# Altium PCB PCB.PcbDoc
Units mil, origin at the board's own origin, x right, y up, seen from the top; angles counter-clockwise.
Board outline 2499.71 x 2229.35 mil, 2 copper layers (Top Layer, Bottom Layer); 11 components, 29 nets, 80 pads, 62 vias.
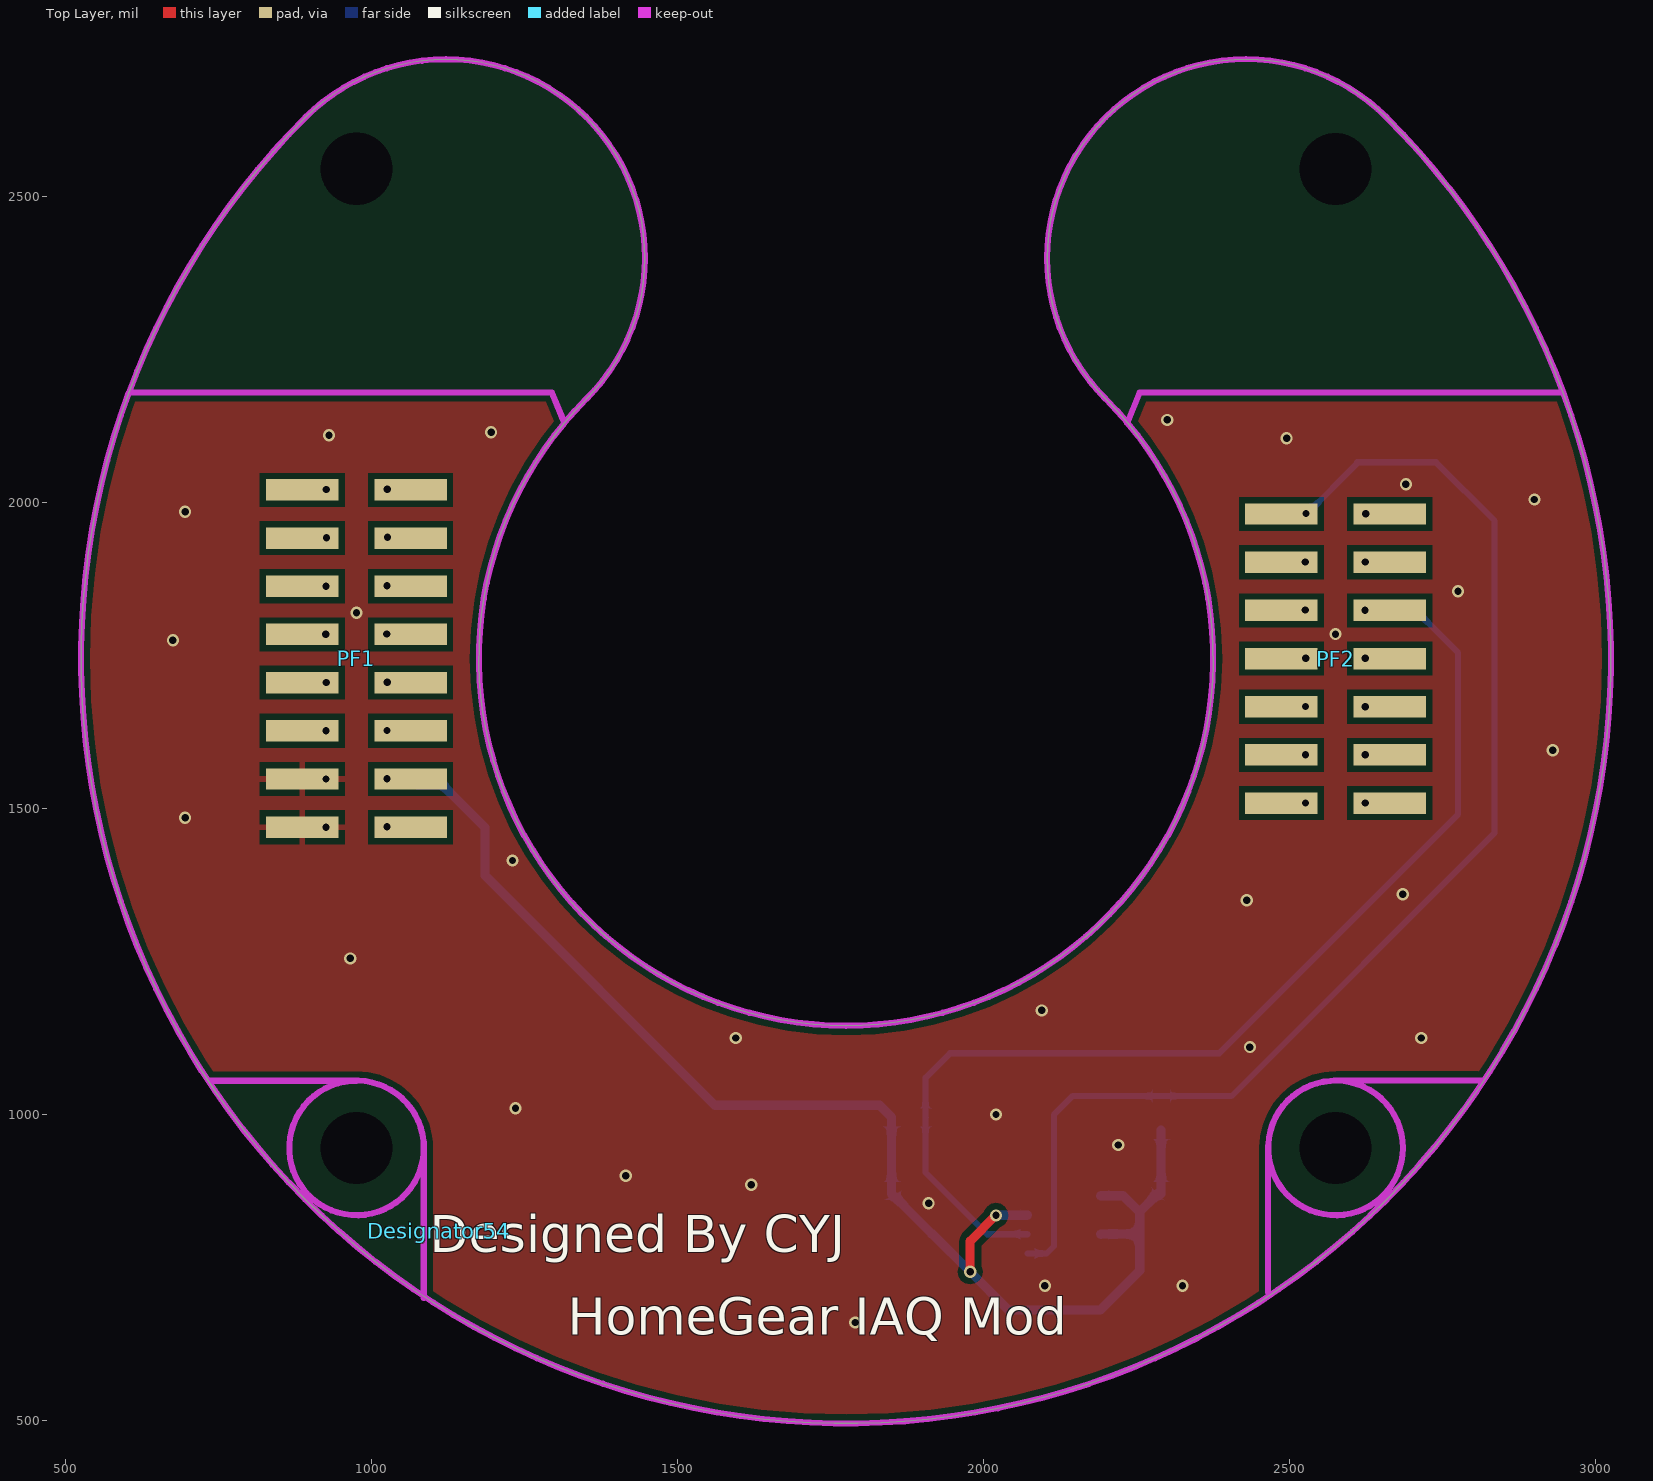
[diagram p0: Top Layer view]
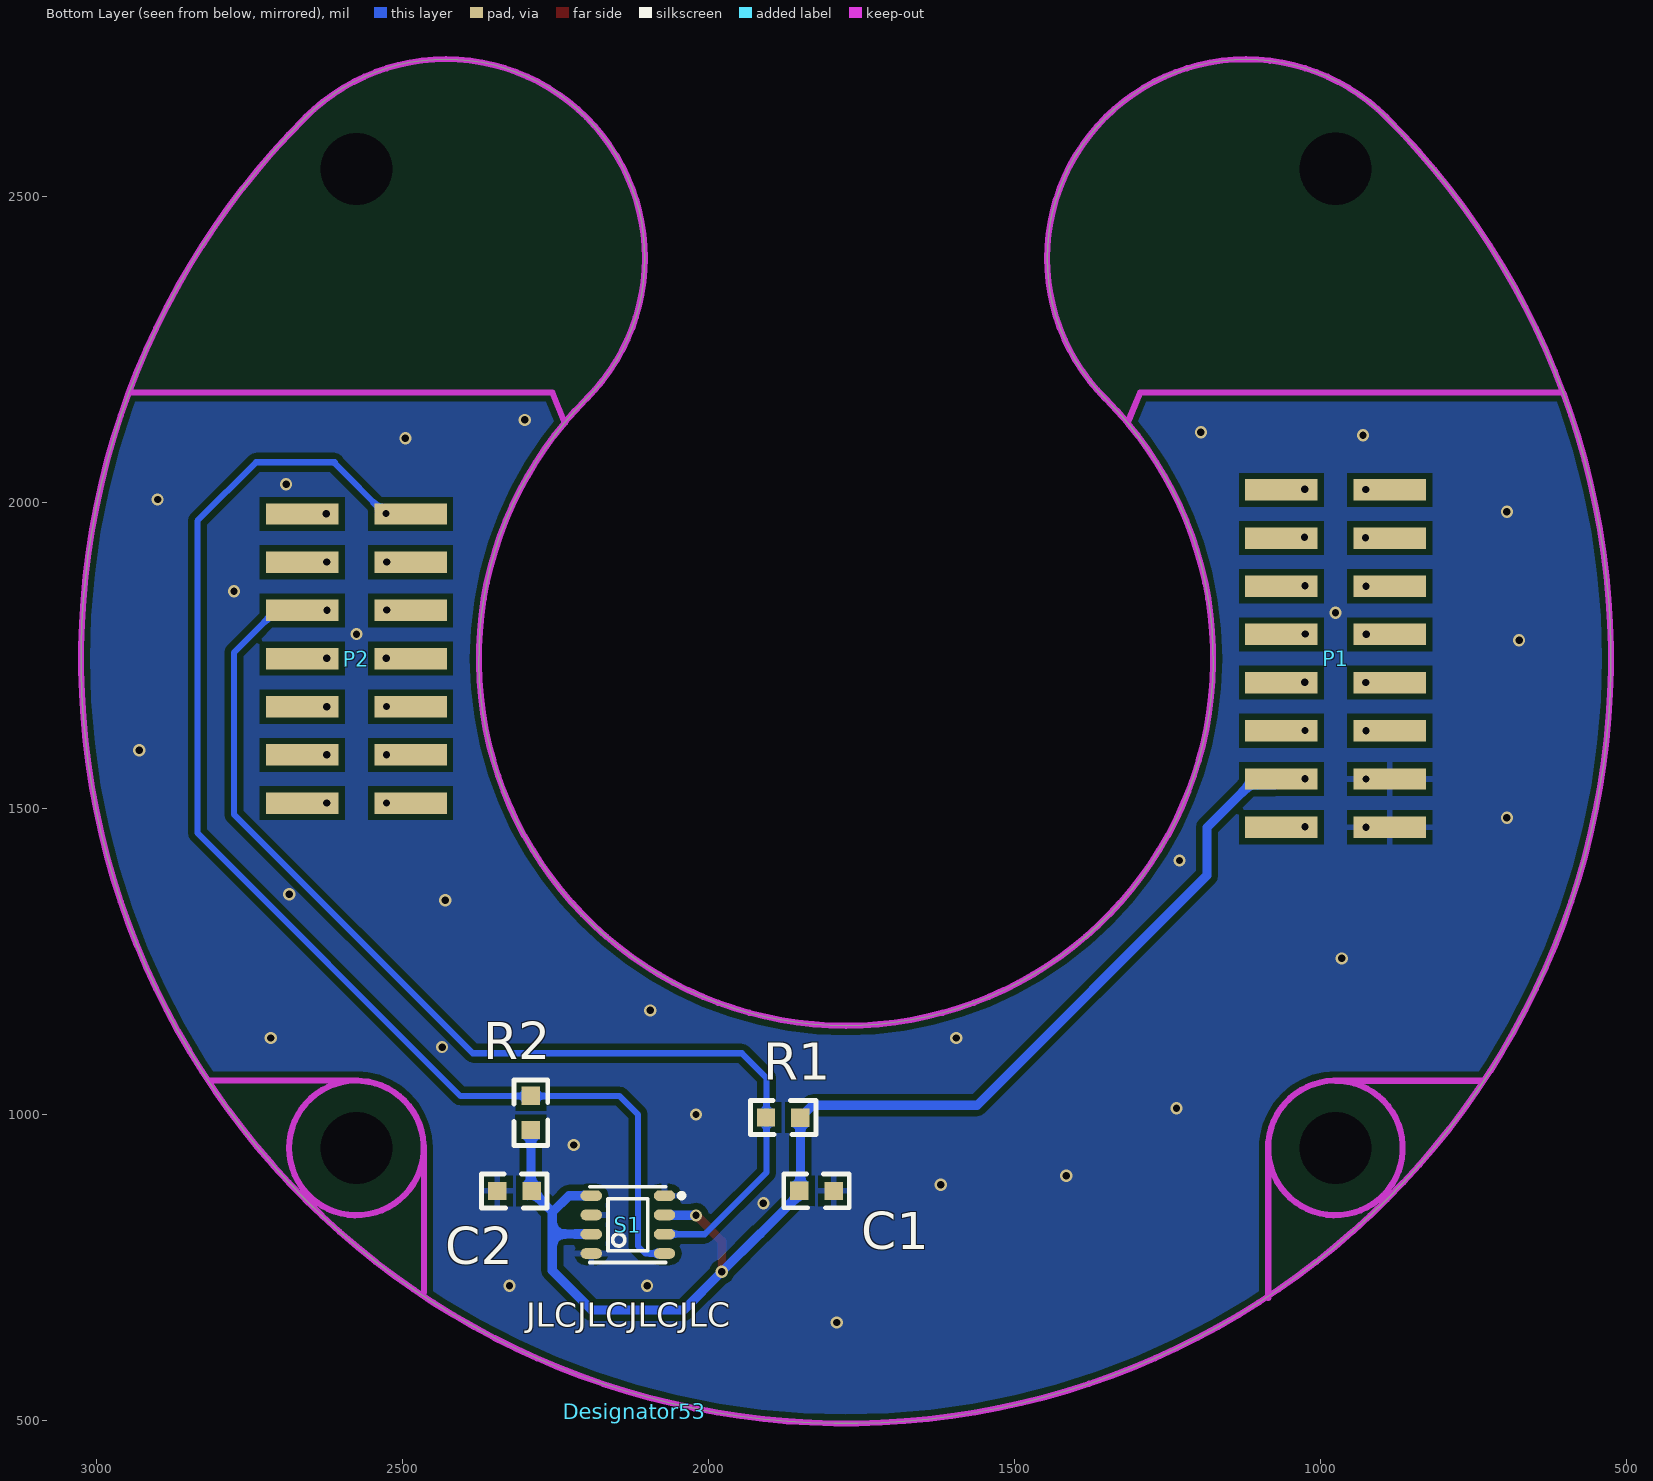
[diagram p1: Bottom Layer view, seen from below]
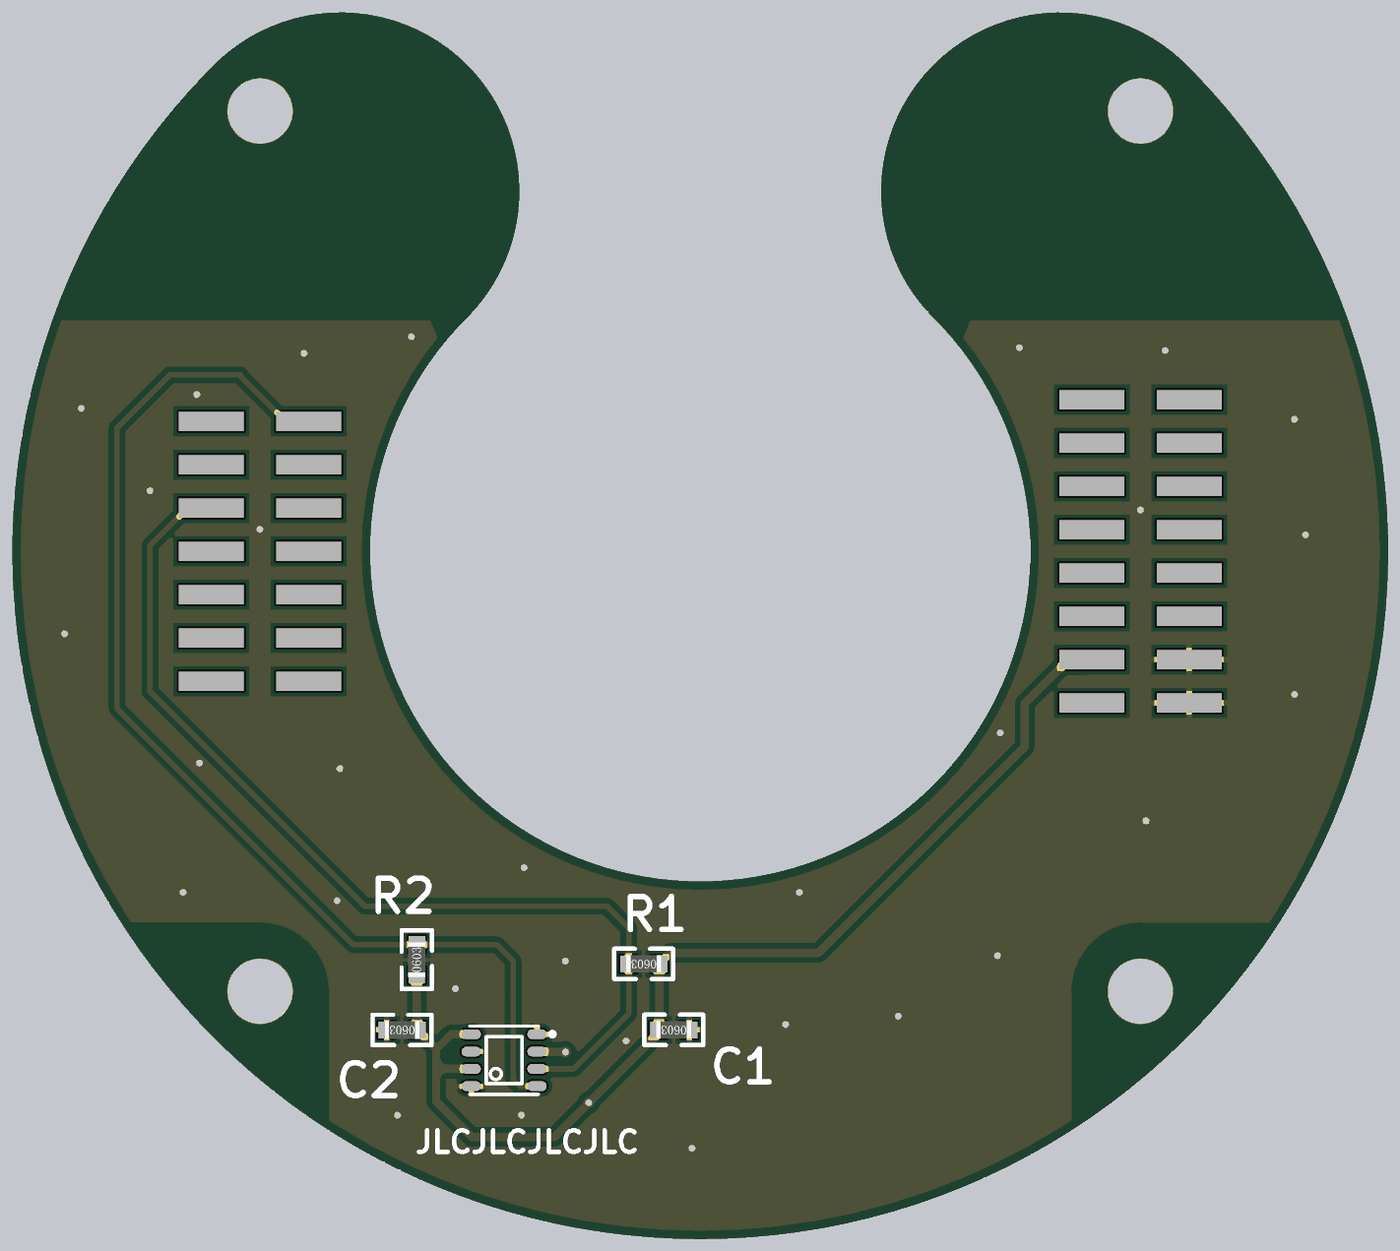
[diagram p2: 3D render of the assembled board from below, using the file's embedded part models]

## Layer stack, top to bottom
Top Solder: solder mask 0.4, Solder Resist, Dk 3.5
Top Layer: signal copper 1.4
Dielectric 1: dielectric 12.6, FR-4, Dk 4.8
Bottom Layer: signal copper 1.4
Bottom Solder: solder mask 0.4, Solder Resist, Dk 3.5

## Board outline
891.31,2629.08 ccw(c1775,1745) 2658.93,2628.83 2658.66,2629.23 ccw(c2428.78,2399.49) 2199.04,2169.61 2199.31,2169.21 cw(c1775,1745) 1350.74,2169.26 1351,2169.52 ccw(c1121.25,2399.4)

## Design rules (kind name [scope] priority, off if disabled: settings)
Clearance [All] p1: gap=10 ignorepadtopadclearanceinfootprint=FALSE except(0: Arc-Hole Track-Hole SMDPad-Hole THPad-Hole Via-Hole Fill-Hole Poly-Hole Region-Hole Text-Hole)
PolygonConnect [All] p1: thpad.connectstyle=Relief thpad.reliefconductorwidth=10 thpad.reliefentries=4 thpad.polygonreliefangle="90 Angle" thpad.airgapwidth=10 smdpad.connectstyle=Relief smdpad.reliefconductorwidth=10 smdpad.reliefentries=4 smdpad.polygonreliefangle="90 Angle" smdpad.airgapwidth=10 via.connectstyle=Direct via.reliefconductorwidth=10 via.reliefentries=4 via.polygonreliefangle="90 Angle" via.airgapwidth=10
RoutingVias [All] p1: holewidth=28 width=50 viastyle="Through Hole" minholewidth=28 minwidth=50 maxholewidth=28 maxwidth=50
SolderMaskExpansion [All] p1: expansion=4 istentingtop=FALSE
Width [All] p1: maxlimit=90 minlimit=10 preferedwidth=10 minimp=50.000000 maximp=50.000000 favimp=50.000000
30 further rules are at their usual default settings.

## Classes and differential pairs
component class Sheet: C1 C2 P1 P2 PF1 PF2 R1 R2 S1

## Components (designator, comment, footprint, x,y, rotation, side; value= is the part's Value field where it differs from the comment)
C1 "Cap" MY0603 1825.44,875.11 r0 bottom value=0.1uF
C2 "Cap" MY0603 2319.2,875 r0 bottom value=0.1uF
Designator53 "Comment" JLC_CLI_NO 2120,515 r180 bottom
Designator54 "Comment" DesignedByCYJ 1110,810 r0 top
P1 "Header 8X2" SMD_PIN_HDR8x2_2.0MM 975,1745 r270 bottom
P2 "Header 7X2" SMD_PIN_HDR7x2_2.0MM 2575,1745 r270 bottom
PF1 "Header 8X2" SMD_FEM_HDR8x2_2.0MM 975,1745 r270 top
PF2 "Header 7X2" SMD_FEM_HDR7x2_2.0MM 2575,1745 r270 top
R1 "Res" MY0603 1880,995 r0 bottom value=4.7K
R2 "Res" MY0603 2290,1005 r90 bottom value=4.7K
S1 "BME680" LGA-8 2131.45,820 r180 bottom

## Footprints (in the part's own frame and the unit in brackets; to place one, negate y for a bottom-side part, rotate by r counter-clockwise, add the part's x,y. Pads: shape width x height; smd on the part's side, far side on the other; paste and mask are expansions set on the pad)
DesignedByCYJ [mil]
JLC_CLI_NO [mil]
LGA-8 [mil]
  oval 35x17.64 smd: 1(59.83,47.24) 2(59.83,15.74) 3(59.83,-15.75) 4(59.83,-47.25) 5(-59.82,-47.25) 6(-59.82,-15.75) 7(-59.82,15.75) 8(-59.82,47.24)
  silkscreen extent -62,-62 92,62
MY0603 [mil]
  rect 30x30 smd: 1(-30.44,0.11) 2(25.8,0)
  silkscreen extent -56,-28 51,28, body extent -34,-16 29,16, height 18
SMD_FEM_HDR7x2_2.0MM [mm]
  rect 0.89x3 smd: 1(-6,-2.25) 2(-6,2.25) 3(-4,-2.25) 4(-4,2.25) 5(-2,-2.25) 6(-2,2.25) 7(0,-2.25) 8(0,2.25) 9(2,-2.25) 10(2,2.25) 11(4,-2.25) 12(4,2.25) 13(6,-2.25) 14(6,2.25)
SMD_FEM_HDR8x2_2.0MM [mm]
  rect 0.89x3 smd: 1(-7,-2.25) 2(-7,2.25) 3(-5,-2.25) 4(-5,2.25) 5(-3,-2.25) 6(-3,2.25) 7(-1,-2.25) 8(-1,2.25) 9(1,-2.25) 10(1,2.25) 11(3,-2.25) 12(3,2.25) 13(5,-2.25) 14(5,2.25) 15(7,-2.25) 16(7,2.25)
SMD_PIN_HDR7x2_2.0MM [mm]
  rect 0.89x3 smd: 1(-6,2.25) 2(-6,-2.25) 3(-4,2.25) 4(-4,-2.25) 5(-2,2.25) 6(-2,-2.25) 7(0,2.25) 8(0,-2.25) 9(2,2.25) 10(2,-2.25) 11(4,2.25) 12(4,-2.25) 13(6,2.25) 14(6,-2.25)
SMD_PIN_HDR8x2_2.0MM [mm]
  rect 0.89x3 smd: 1(-7,2.25) 2(-7,-2.25) 3(-5,2.25) 4(-5,-2.25) 5(-3,2.25) 6(-3,-2.25) 7(-1,2.25) 8(-1,-2.25) 9(1,2.25) 10(1,-2.25) 11(3,2.25) 12(3,-2.25) 13(5,2.25) 14(5,-2.25) 15(7,2.25) 16(7,-2.25)

## Part data
C1 C2: "Capacitor", LatestRevisionDate=17-Jul-2002, LatestRevisionNote="Re-released for DXP Platform.", PackageDescription="Radial Cap, Thru-Hole; 2 Leads; 0.3 in Pin Spacing", PackageReference=RAD-0.3, Published=8-Jun-2000, Publisher="Altium Limited"
P1 PF1: "Header, 8-Pin, Dual row", LatestRevisionDate=17-Jul-2002, LatestRevisionNote="Re-released for DXP Platform.", Publisher="Altium Limited"
P2 PF2: "Header, 7-Pin, Dual row", LatestRevisionDate=17-Jul-2002, LatestRevisionNote="Re-released for DXP Platform.", Publisher="Altium Limited"
R1 R2: library part Res2, "Resistor", LatestRevisionDate=17-Jul-2002, LatestRevisionNote="Re-released for DXP Platform.", PackageDescription="Axial Device, Thru-Hole; 2 Leads; 0.4 in Pin Spacing", PackageReference=AXIAL-0.4, Published=8-Jun-2000, Publisher="Altium Limited"

## Free pads (board coordinates)
  round 0 hole 118.11: 2(975,2545.25) 2(975.21,945.25) 2(2575,945.25) 2(2575,2545.21)

## Via types
v1: diameter 20, hole 12, Top Layer to Bottom Layer, tented both sides, 32 vias
v2: diameter 20, hole 12, Top Layer to Bottom Layer, 30 vias

## Nets (pads, with @x,y where several pads share a name; then routed paths per layer and width w, separated by ;. In a path a pad name is that pad's centre, name@x,y a point inside that pad or via, vN(x,y) a via of type N, cw(c..) or ccw(c..) an arc to the next point about the centre after c; other vN are vias at no path point)
+3.3: C1.2 C2.1 P1.14 PF1.14 R1.1 R2.1 S1.2 S1.6 S1.8 | length 2245.2
  Top Layer w15: v1(1977.87,742.82) 1977.87,792.87 v1(2020,835)
  Bottom Layer w15: P1.14 1073.6,1538.13 1115.83,1538.13 1185.18,1468.77 1185.18,1390.5 1560.69,1015 1735,1015 1829.68,1015 1849.56,995.11 R1.1 1849.56,870.44 1914.87,805.13 1915.56,805.13 v1(1977.87,742.82) 2040.18,680.5 2190.5,680.5 2255,745 2255,804.54 ; v1(2020,835) 2020.37,835.37 2071.25,835.37 S1.2 ; S1.6 2191.56,804.54 2255,804.54 ; S1.8 2227.76,867.24 2255,840 ; C2.1 2255,841.13 2255,804.54 ; C2.1@2290,870 R2.1@2290,974.45
  other v2: 1024.9,1548.68
+5: P1.16 PF1.16
  other v2: 1024.9,1469.93
CS1: P2.7 PF2.7
  other v2: 2526.06,1745.49
GND: C1.1 C2.2 P1.13 P1.15 PF1.13 PF1.15 S1.1 S1.5 S1.7
  other v1: 1790,660 2100,720 2325,720 1910,855 1620,885 1415,900 2220,950 2020,1000 1235,1010 2435,1110 1595,1125 2715,1125 2095,1170 965,1255 2430,1350 2685,1360 1230,1415 695,1485 2930,1595 675,1775 2575,1785 975,1820 2775,1855 695,1985 2900,2005 2690,2030 2495,2105 930,2110 1195,2115 2300,2135
  other v2: 925.2,1469.51 925.2,1548.27
IO0: P2.11 PF2.11
  other v2: 2525.85,1587.81
IO2: P2.14 PF2.14
  other v2: 2623.43,1508.88
IO4: P2.12 PF2.12
  other v2: 2623.43,1587.63
IO12: P1.11 PF1.11
  other v2: 925.2,1627.01
IO13: P1.12 PF1.12
  other v2: 1024.9,1627.42
IO14: P1.10 PF1.10
  other v2: 1025.11,1706.36
IO15: P2.13 PF2.13
  other v2: 2525.85,1509.05
IO25: P1.7 PF1.7
  other v2: 924.95,1784.77
IO26: P1.8 PF1.8
  other v2: 1024.65,1785.18
IO27: P1.9 PF1.9
  other v2: 925.41,1705.95
IO32: P1.5 PF1.5
  other v2: 925.1,1863.33
IO33: P1.6 PF1.6
  other v2: 1024.79,1863.74
IO34: P1.3 PF1.3
  other v2: 926.13,1942.55
IO35: P1.4 PF1.4
  other v2: 1025.83,1942.96
MISO: P2.5 PF2.5
  other v2: 2525.6,1824.31
MOSI: P2.2 PF2.2
  other v2: 2624.36,1981.91
RXD0: P2.3 PF2.3
  other v2: 2525.75,1902.87
RXD1: P2.9 PF2.9
  other v2: 2525.85,1666.55
SCK: P2.8 PF2.8
  other v2: 2623.64,1745.32
SCL: P2.1 PF2.1 R2.2 S1.4 | length 2108.5
  Bottom Layer w10: S1.4 2102.75,772.75 2115,785 2115,1000 2145,1030 2290,1030 2405,1030 2835,1460 2835,1970 2739.14,2065.86 2610.55,2065.86 2610.55,2063.82 2527.95,1981.22 P2.1
  other v2: 2526.78,1982.09
SDA: P2.6 PF2.6 R1.2 S1.3 | length 1816.7
  Bottom Layer w10: R1.2@1905,995 1905,1060 1945,1100 2385,1100 2775,1490 2775,1755 2718.78,1811.22 2676.1,1811.22 P2.6 ; R1.2 1905,994.2 1905,905 2005.75,804.25 S1.3
  other v2: 2623.18,1824.13
SENSOR_VN: P1.2 PF1.2
  other v2: 1025.54,2021.66
SENSOR_VP: P1.1 PF1.1
  other v2: 925.84,2021.24
TXD0: P2.4 PF2.4
  other v2: 2623.32,1902.7
TXD1: P2.10 PF2.10
  other v2: 2623.43,1666.37

## Polygon pours and split planes (outlines as drawn)
GND on Bottom Layer "NONET_L-01_P-001" (solid, remove dead copper, pour order 2): 530.89,2177.39 3045.89,2177.39 3045.89,967.39 2505.89,427.39 975.89,427.39 120.89,1282.39
GND on Top Layer "NONET_L-01_P-001" (solid, remove dead copper, pour order 3): 535,2180 3050,2180 3050,970 2510,430 980,430 125,1285

## Keep-outs
Keep-Out Layer:
  circle w10: c975.21,945.25 r110
  circle w10: c2575,945.25 r110
  lines w10: 605.3,2179.7 1294.29,2179.7 1315,2130 ; 735,1055 975,1055 ; 891.31,2629.08 ccw(c1775,1745) 2658.93,2628.83 ; 891.38,2629.14 cw(c1121.25,2399.4) 1351,2169.52 ; 1085,700 1085,955 ; 1350.74,2169.26 ccw(c1775,1745) 2199.31,2169.21 ; 2199.04,2169.61 cw(c2428.78,2399.49) 2658.66,2629.23 ; 2234.3,2130.07 2234.43,2129.75 2255.11,2179.96 2944.96,2179.96 ; 2464.7,709.05 2464.7,949.05 ; 2572.93,1055.3 2816.54,1055.3

## Silkscreen, mask and mechanical layers (free items; w line width, h text height)
Top Overlay:
  text "HomeGear IAQ Mod" at 1320,640 h60
Mechanical 1:
  lines w10: 891.31,2629.08 ccw(c1775,1745) 2658.93,2628.83 ; 891.38,2629.14 cw(c1121.25,2399.4) 1351,2169.52 ; 1350.74,2169.26 ccw(c1775,1745) 2199.31,2169.21 ; 2199.04,2169.61 cw(c2428.78,2399.49) 2658.66,2629.23

## Text inside footprints (layer, text, board x,y; h text height)
Designator53: Bottom Overlay "JLCJLCJLCJLC" at 2297.13,652.87 h39.37
Designator54: Top Overlay "Designed By CYJ" at 1095,774.99 h60